# Altium PCB Teslenko №4 №1 man.PcbDoc
Units mil, origin at the board's own origin, x right, y up, seen from the top; angles counter-clockwise.
Board outline 5905.51 x 3149.61 mil, 2 copper layers (Top Layer, Top, Bottom Layer, Bottom); 15 components, 10 nets, 30 pads, 0 vias.
Unrouted connection lines stored in the file: 20.
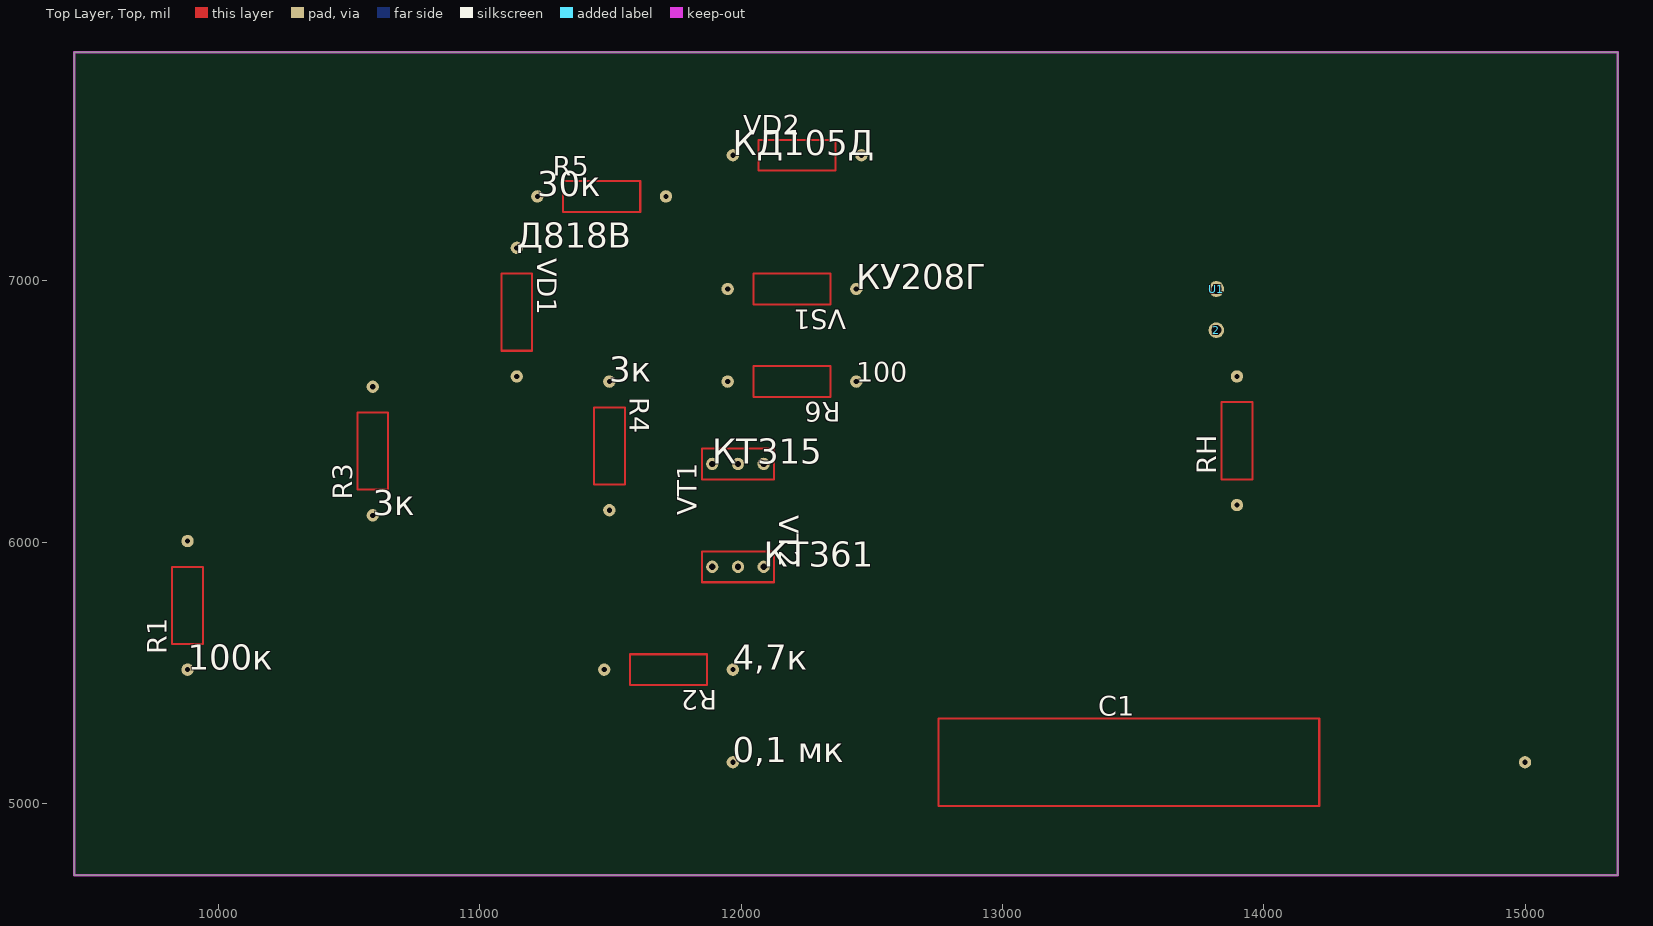
[diagram p0: Top Layer, Top view]
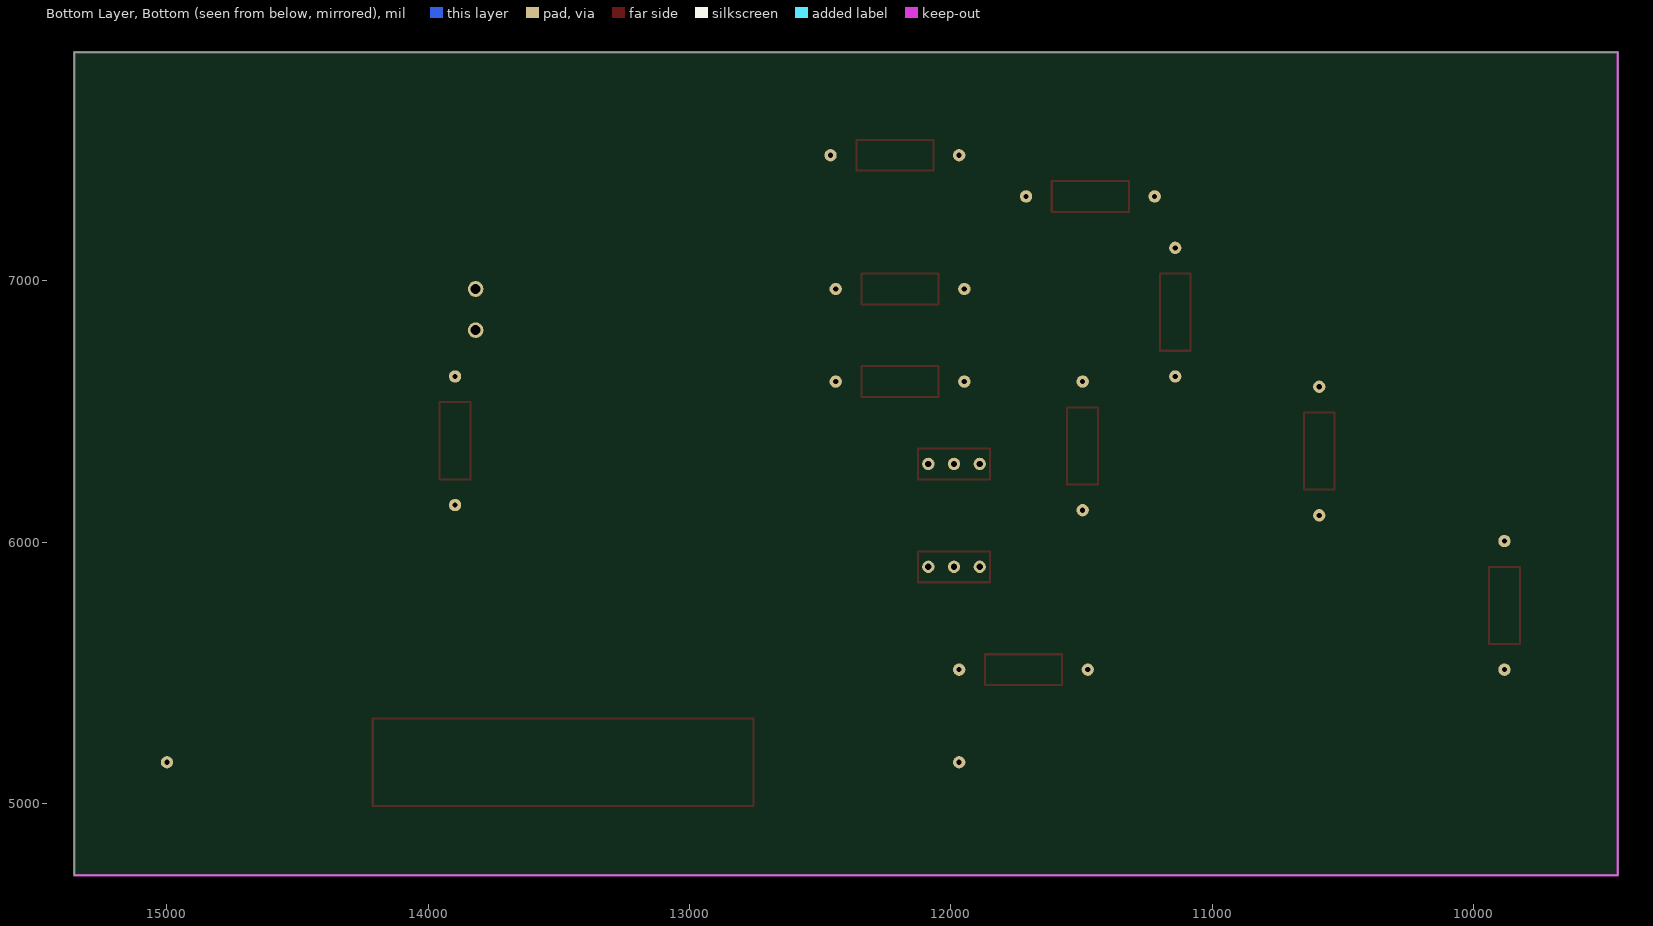
[diagram p1: Bottom Layer, Bottom view, seen from below]

## Layer stack, top to bottom
Top Solder, Top Mask: solder mask 0.4, Solder Resist, Dk 3.5
Top Layer, Top: signal copper 1.4
Dielectric 1: dielectric 12.6, FR-4, Dk 4.8
Bottom Layer, Bottom: signal copper 1.4
Bottom Solder, Bot Mask: solder mask 0.4, Solder Resist, Dk 3.5

## Board outline
9448.82,4724.41 15354.33,4724.41 15354.33,7874.02 9448.82,7874.02

## Design rules (kind name [scope] priority, off if disabled: settings)
Clearance [All] p1: gap=10 ignorepadtopadclearanceinfootprint=FALSE except(11.81: Arc-Arc Arc-Track Arc-THPad Arc-Via Track-Track Track-THPad Track-Via THPad-THPad THPad-Via Via-Via)
PlaneClearance [All] p1: clearance=10
PolygonConnect [All] p1: connectstyle=Relief reliefconductorwidth=10 reliefentries=4 polygonreliefangle="90 Angle" airgapwidth=10
RoutingVias [All] p1: holewidth=28 width=50 viastyle="Through Hole" minholewidth=28 minwidth=50 maxholewidth=28 maxwidth=50
SolderMaskExpansion [All] p1: expansion=4 istentingtop=FALSE
Width [All] p1: maxlimit=10 minlimit=10 preferedwidth=10
29 further rules are at their usual default settings.

## Components (designator, comment, footprint, x,y, rotation, side; value= is the part's Value field where it differs from the comment)
2 "" STR 13818.9,6811.02 r0 top
C1 "0,1 мк" "K50-29_K50 – 29(Primary)" 11968.5,5157.48 r0 top
R1 "100к" RESISTOR_RESISTOR(Primary) 9881.89,5511.81 r90 top
R2 "4,7к" RESISTOR_RESISTOR_STATIC(Primary) 11968.5,5511.81 r180 top
R3 "3к" RESISTOR 10590.55,6102.36 r90 top
R4 "3к" RESISTOR 11496.06,6614.17 r270 top
R5 "30к" RESISTOR_RESISTOR_STATIC(2V)(Primary) 11220.47,7322.83 r0 top
R6 "100" RESISTOR 12440.94,6614.17 r180 top
RH "" RESISTOR_RESISTOR(Primary) 13897.64,6141.73 r90 top
U1 "" STR 13818.9,6968.5 r0 top
VD1 "Д818В" KD522B_DIOD_2(Primary) 11141.73,7125.98 r270 top
VD2 "КД105Д" KD522B_DIOD(Primary) 11968.5,7480.31 r0 top
VS1 "КУ208Г" KD522B_DIOD_3(Primary) 12440.94,6968.5 r180 top
VT1 "КТ315" KT940_NPN(Primary) 11889.76,6299.21 r90 top
VT2 "КТ361" KT940_NPN_2(Primary) 12086.61,5905.51 r270 top

## Footprints (in the part's own frame and the unit in brackets; to place one, negate y for a bottom-side part, rotate by r counter-clockwise, add the part's x,y. Pads: shape width x height; smd on the part's side, far side on the other; paste and mask are expansions set on the pad)
"K50-29_K50 – 29(Primary)" [mm]
  round 1.2 hole 0.5: I(0,0) O(77,0)
  Top Layer, Top lines w0.2: 20,-4.25 20,4.25 57,4.25 57,-4.25 20,-4.25
KD522B_DIOD(Primary) [mm]
  round 1.2 hole 0.5: A(0,0) B(12.5,0)
  Top Layer, Top lines w0.2: 2.5,-1.5 10,-1.5 10,1.5 2.5,1.5 2.5,-1.5
KD522B_DIOD_2(Primary) [mm]
  round 1.2 hole 0.5: 0(12.5,0) 1(0,0)
  Top Layer, Top lines w0.2: 10,-1.5 2.5,-1.5 2.5,1.5 10,1.5 10,-1.5
KD522B_DIOD_3(Primary) [mm]
  round 1.2 hole 0.5: 0(12.5,0) 1(0,0)
  Top Layer, Top lines w0.2: 10,1.5 2.5,1.5 2.5,-1.5 10,-1.5 10,1.5
KT940_NPN(Primary) [mm]
  round 1.2 hole 0.6: B(0,-5) E(0,0) K(0,-2.5)
  Top Layer, Top lines w0.2: 0,-2.5 0,-3 ; -1.5,1 -1.5,-6 1.5,-6 1.5,1 -1.5,1
KT940_NPN_2(Primary) [mm]
  round 1.2 hole 0.6: 0(0,0) 1(0,-2.5) 2(0,-5)
  Top Layer, Top lines w0.2: 0,-3 0,-2.5 ; 1.5,-6 1.5,1 -1.5,1 -1.5,-6 1.5,-6
RESISTOR [mm]
  round 1.2 hole 0.5: 1(0,0) 2(12.5,0)
  Top Layer, Top lines w0.2: 2.5,1.5 2.5,-1.5 10,-1.5 10,1.5 2.5,1.5
RESISTOR_RESISTOR(Primary) [mm]
  round 1.2 hole 0.5: A(0,0) B(12.5,0)
  Top Layer, Top lines w0.2: 2.5,1.5 2.5,-1.5 10,-1.5 10,1.5 2.5,1.5
RESISTOR_RESISTOR_STATIC(2V)(Primary) [mm]
  round 1.2 hole 0.5: 0(12.5,0) 1(0,0)
  Top Layer, Top lines w0.2: 2.5,-1.5 2.5,1.5 10,1.5 10,-1.5 2.5,-1.5
RESISTOR_RESISTOR_STATIC(Primary) [mm]
  round 1.2 hole 0.5: 0(12.5,0) 1(0,0)
  Top Layer, Top lines w0.2: 10,1.5 10,-1.5 2.5,-1.5 2.5,1.5 10,1.5
STR [mil]
  round 60 hole 38: 1(0,0)

## Nets (pads, with @x,y where several pads share a name; then routed paths per layer and width w, separated by ;. In a path a pad name is that pad's centre, name@x,y a point inside that pad or via, vN(x,y) a via of type N, cw(c..) or ccw(c..) an arc to the next point about the centre after c; other vN are vias at no path point)
NET00000: R1.A R2.0
NET00001: C1.I R2.1 VT2.1
NET00003: R3.1 R4.2
NET00004: R1.B R3.2 R5.1 VD1.1
NET00005: C1.O R4.1 R6.1 R6.2 RH.A VD1.0 VS1.0 VT1.K
NET00006: 2.1 RH.B
NET00008: U1.1 VD2.B VS1.1
NET00009: R5.0 VD2.A
NET00011: VT1.B VT2.0
NET00014: VT1.E VT2.2

## Keep-outs
Keep-Out Layer, Board:
  lines w5: 9448.82,4724.41 9448.82,7874.02 15354.33,7874.02 15354.33,4724.41 9448.82,4724.41
  lines w10: 9448.82,4724.41 15354.33,4724.41 15354.33,7874.02 9448.82,7874.02 9448.82,4724.41